# EAGLE board 13584_SparkFun_Photon_Weather_Shield_panel_V11 (EAGLE 7.5.0), part 1 of 2
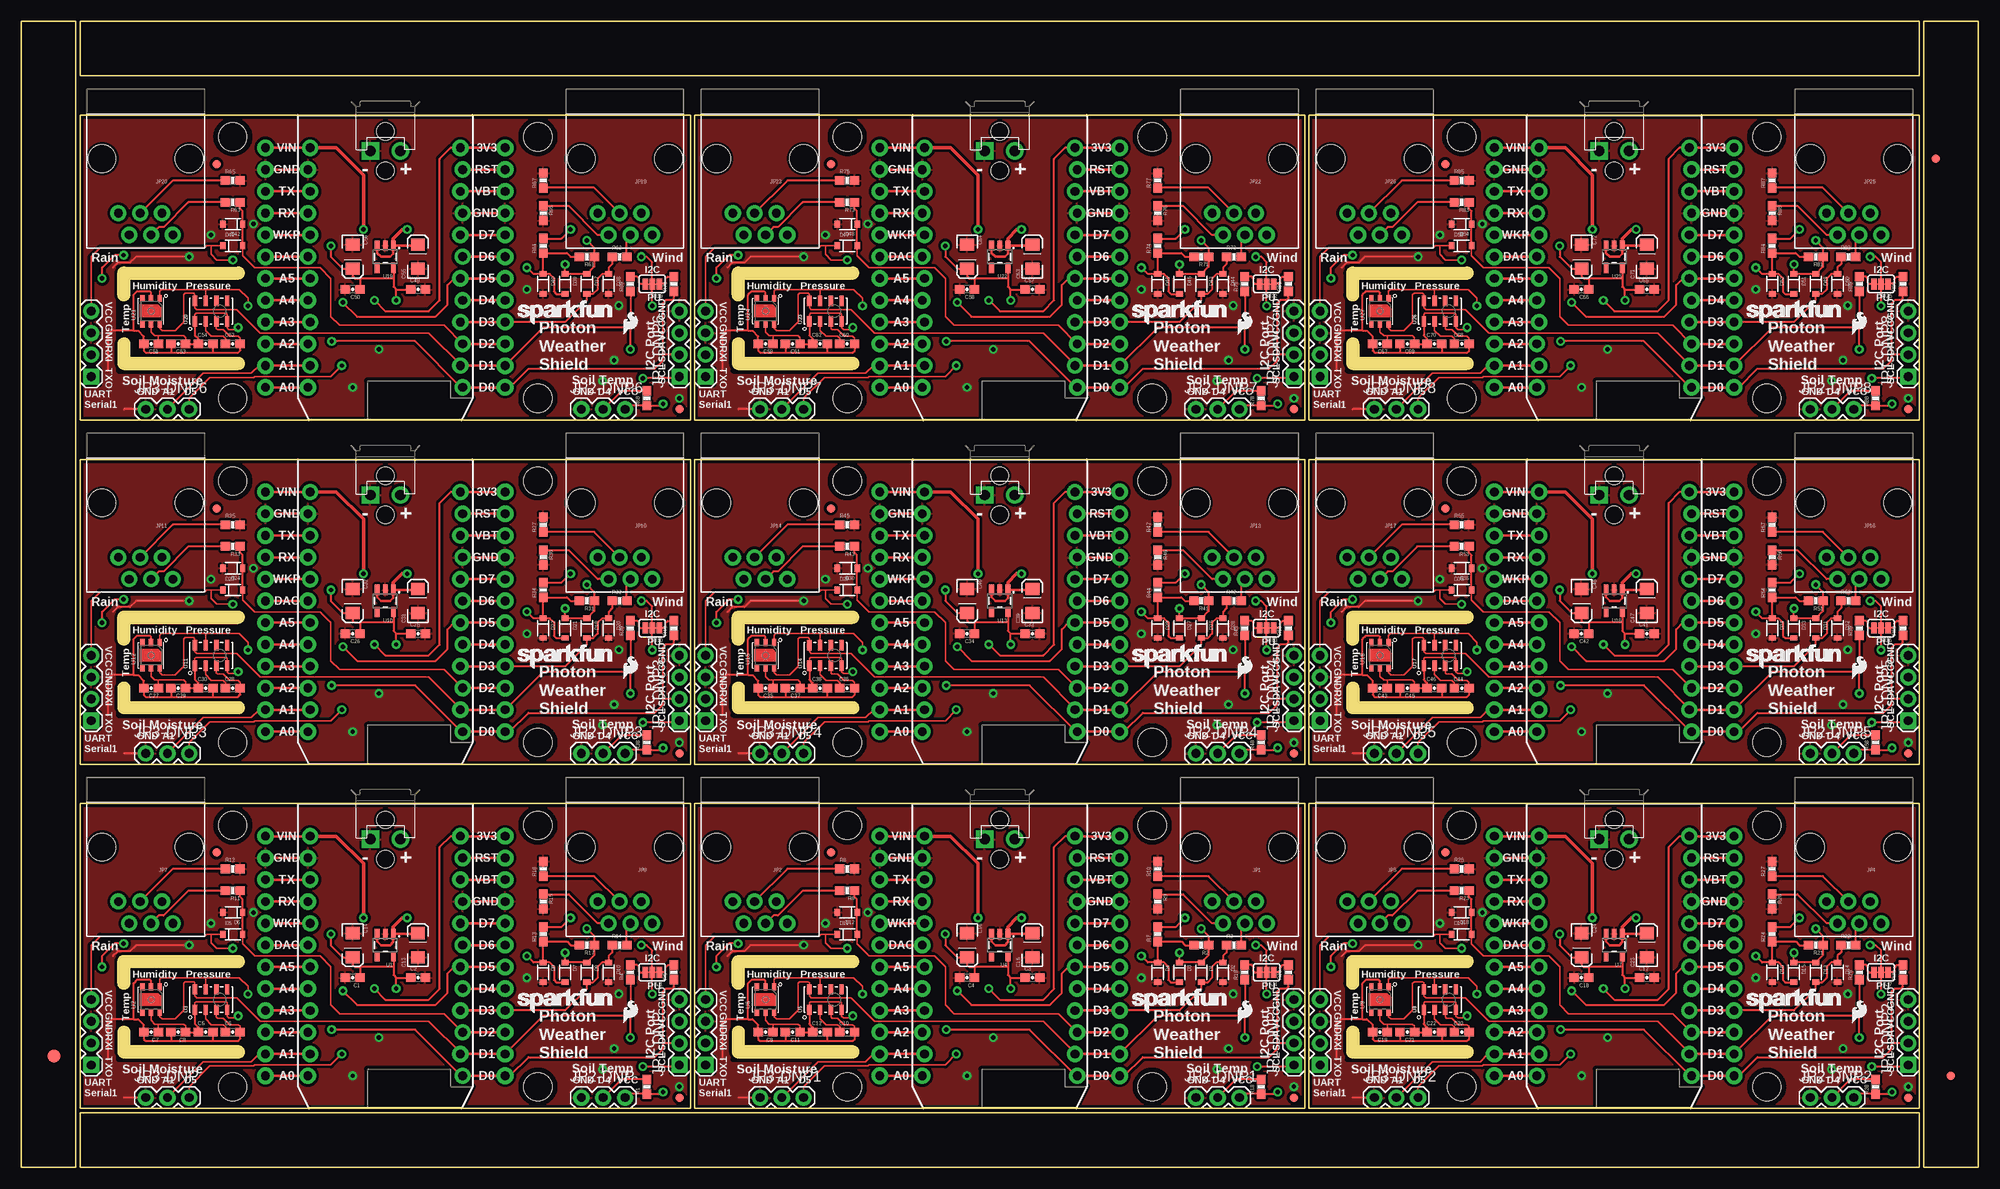
[diagram p0: board, top side]
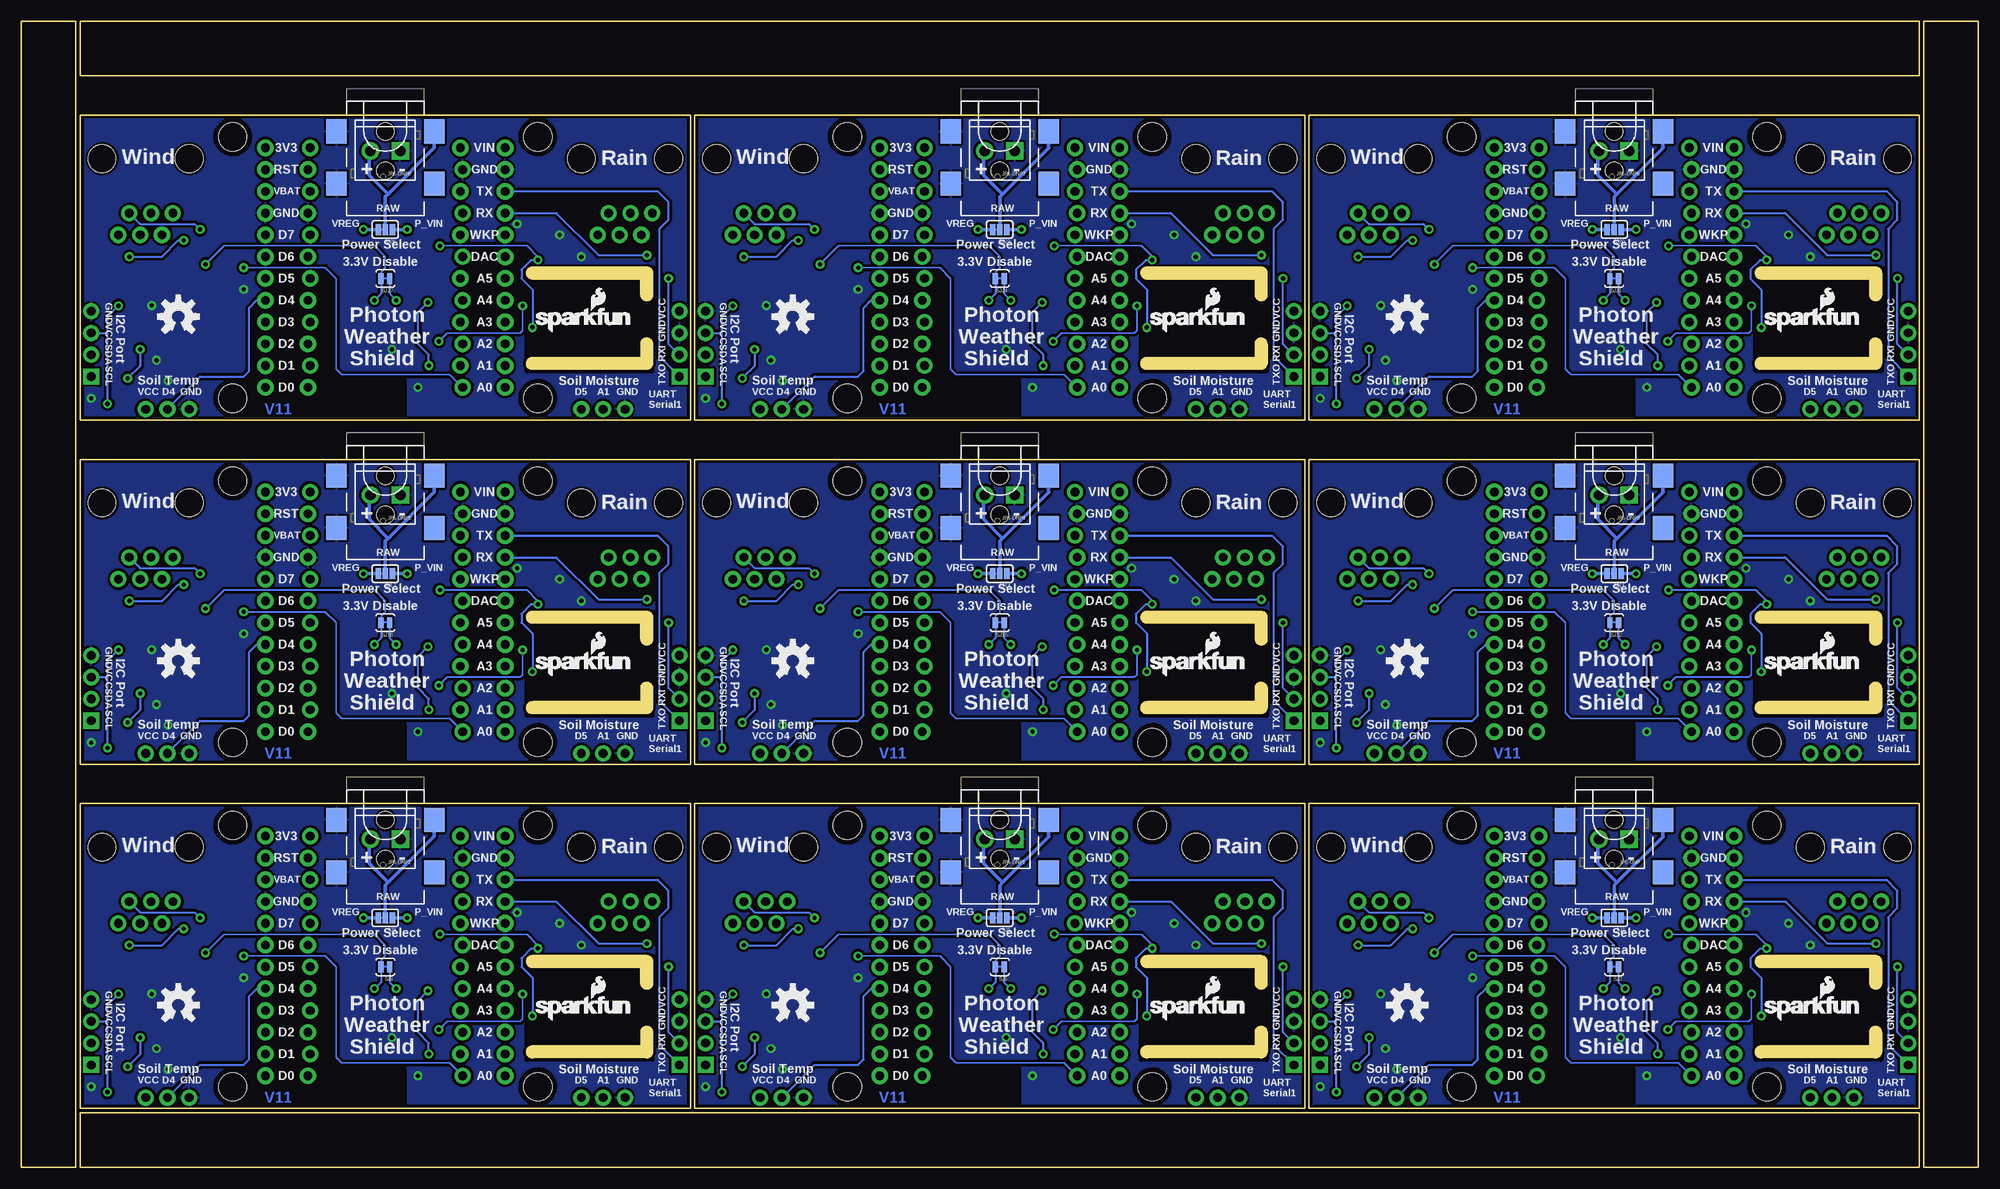
[diagram p1: board, bottom side, seen from below]

Size 228.09 x 133.6 mm. Coordinates in mm from the lower left corner, seen from the top.
Outline: 222 segments
Copper layers (1*16): Top 0.035mm / dielectric 1.5mm / Bottom 0.035mm
Design rules "SparkFun-2-layer-STANDARD": minimum track width 10mil, minimum drill 20mil, track to track 10mil, track to pad 8mil, pad to pad 8mil, via to via 10mil, smd to smd 8mil, copper to edge 8mil, drill to drill 8mil, minimum pad ring 10mil, minimum via ring 10mil, stop-mask expansion 4mil, vias tented up to drill 25mil, thermal gap 10mil
Net classes: 0 Default: width 0.203 mm; 1 vcc: width 0.203 mm
tRestrict: area 11.3,12.6 to 25.9,24.6; area 82.9,12.6 to 97.5,24.6; area 154.6,12.6 to 169.2,24.6; area 11.3,52.7 to 25.9,64.8; area 82.9,52.7 to 97.5,64.8; area 154.6,52.7 to 169.2,64.8; area 11.3,92.8 to 25.9,104.9; area 82.9,92.8 to 97.5,104.9; area 154.6,92.8 to 169.2,104.9
bRestrict: area 11.3,12.6 to 25.9,24.6; area 82.9,12.6 to 97.5,24.6; area 154.6,12.6 to 169.2,24.6; area 11.3,52.7 to 25.9,64.8; area 82.9,52.7 to 97.5,64.8; area 154.6,52.7 to 169.2,64.8; area 11.3,92.8 to 25.9,104.9; area 82.9,92.8 to 97.5,104.9; area 154.6,92.8 to 169.2,104.9
Milling: 36 lines

## Footprints (pad centres in the part's own frame; a part is rotated, then mirrored left to right if it is on the bottom)
0603-CAP = smd 1.1 x 1: 1 -0.85,0; 2 0.85,0
EIA3216 = smd 1.4 x 1.6: A 1.4,0; C -1.4,0
SOD-323 = smd 0.63 x 0.83: A 1.15,0; C -1.15,0
FIDUCIAL-1.5X3 = smd 1.5 x 1.5: 1 0,0
FIDUCIAL-1X2 = smd 1 x 1: 1 0,0
RJ11-6 = drill 1.016 pad 1.88: 1 -3.175,8.89; 2 -1.905,6.35; 3 -0.635,8.89; 4 0.635,6.35; 5 1.905,8.89; 6 3.175,6.35 | hole 3.251: -5.08,0; 5.08,0
1X04 = drill 1.016 pad 1.88 square: 1 0,0 | drill 1.016 pad 1.88: 2 2.54,0; 3 5.08,0; 4 7.62,0
1X03 = drill 1.016 pad 1.88: 1 0,0; 2 2.54,0; 3 5.08,0
SPARK_PHOTON_TEMPLATE_WIDE_LOCKING = drill 1.016 pad 1.905: 1 1.397,31.75; 2 1.143,29.21; 3 1.397,26.67; 4 1.143,24.13; 5 1.397,21.59; 6 1.143,19.05; 7 1.397,16.51; 8 1.143,13.97; 9 1.397,11.43; 10 1.143,8.89; 11 1.397,6.35; 12 1.143,3.81; 13 19.177,3.81; 14 18.923,6.35; 15 19.177,8.89; 16 18.923,11.43; 17 19.177,13.97; 18 18.923,16.51; 19 19.177,19.05; 20 18.923,21.59; 21 19.177,24.13; 22 18.923,26.67; 23 19.177,29.21; 24 18.923,31.75 | drill 1.016 pad 1.93: 3V3 24.13,31.75; A0 -3.81,3.81; A1 -3.81,6.35; A2 -3.81,8.89; A3 -3.81,11.43; A4 -3.81,13.97; A5 -3.81,16.51; D0 24.13,3.81; D1 24.13,6.35; D2 24.13,8.89; D3 24.13,11.43; D4 24.13,13.97; D5 24.13,16.51; D6 24.13,19.05; D7 24.13,21.59; DAC -3.81,19.05; GND@0 -3.81,29.21; GND@2 24.13,24.13; RST 24.13,29.21; RX -3.81,24.13; TX -3.81,26.67; VBAT 24.13,26.67; VIN -3.81,31.75; WKP -3.81,21.59 | hole 3.302: -7.62,33.02; 27.94,33.02; -7.62,2.54; 27.94,2.54
POWER_JACK_SMD = smd 2.8 x 2.4: GND 0,-5.7; P$4 6.1,-5.7; VIN0 0,5.7; VIN1 6.1,5.7 | hole 2.032: 0,0; 4.572,0
SCREWTERMINAL-3.5MM-2 = drill 1.2 pad 2.032 square: 1 0,0 | drill 1.2 pad 2.032: 2 3.5,0
0603-RES = smd 1.1 x 1: 1 -0.85,0; 2 0.85,0
PAD-JUMPER-3-3OF3_NC_BY_TRACE_YES_SILK_FULL_BOX = smd 0.635 x 1.27: 1 -0.813,0; 2 0,0; 3 0.813,0
PAD-JUMPER-3-2OF3_NC_BY_TRACE_YES_SILK_FULL_BOX = smd 0.635 x 1.27: 1 -0.813,0; 2 0,0; 3 0.813,0
PAD-JUMPER-2-NC_BY_TRACE_YES_SILK = smd 0.635 x 1.27: 1 -0.508,0; 2 0.508,0
SOT23-5 = smd 0.55 x 1.2: 1 -0.95,-1.3; 2 0,-1.3; 3 0.95,-1.3; 4 0.95,1.3; 5 -0.95,1.3
SI7021 = smd 0.8 x 0.5: DATA 1.5,-1; GND 1.5,0; NC@3 1.5,1; NC@4 -1.5,1; SCK -1.5,-1; VDD -1.5,0
LGA8 = smd 1.2 x 0.5: 1 -1.2,1.875; 2 -1.2,0.625; 3 -1.2,-0.625; 4 -1.2,-1.875; 5 1.2,-1.875; 6 1.2,-0.625; 7 1.2,0.625; 8 1.2,1.875

## Placement (x,y rotation side)
C1  1.0uF  [0603-CAP]  38.61,22.1 180 top
C2  0.1uF  [0603-CAP]  46.23,22.1 0 top
C3  0.1uF  [0603-CAP]  117.86,22.1 0 top
C4  1.0uF  [0603-CAP]  110.24,22.1 180 top
C5  0.1uF  [0603-CAP]  21.46,15.75 0 top
C6  0.1uF  [0603-CAP]  24.64,15.75 0 top
C7  0.1uF  [0603-CAP]  15.11,15.75 180 top
C8  1.0uF  [0603-CAP]  18.29,15.75 180 top
C9  0.1uF  [0603-CAP]  86.74,15.75 180 top
C10  0.1uF  [0603-CAP]  96.27,15.75 0 top
C11  1.0uF  [0603-CAP]  89.92,15.75 180 top
C12  0.1uF  [0603-CAP]  93.09,15.75 0 top
C13  10uF  [EIA3216]  46.23,25.91 90 top
C14  10uF  [EIA3216]  38.61,25.91 270 top
C15  10uF  [EIA3216]  117.86,25.91 90 top
C16  10uF  [EIA3216]  110.24,25.91 270 top
C17  0.1uF  [0603-CAP]  189.48,22.1 0 top
C18  1.0uF  [0603-CAP]  181.86,22.1 180 top
C19  0.1uF  [0603-CAP]  158.37,15.75 180 top
C20  0.1uF  [0603-CAP]  167.89,15.75 0 top
C21  1.0uF  [0603-CAP]  161.54,15.75 180 top
C22  0.1uF  [0603-CAP]  164.72,15.75 0 top
C23  10uF  [EIA3216]  189.48,25.91 90 top
C24  10uF  [EIA3216]  181.86,25.91 270 top
C25  0.1uF  [0603-CAP]  46.23,62.23 0 top
C26  1.0uF  [0603-CAP]  38.61,62.23 180 top
C27  0.1uF  [0603-CAP]  15.11,55.88 180 top
C28  0.1uF  [0603-CAP]  24.64,55.88 0 top
C29  1.0uF  [0603-CAP]  18.29,55.88 180 top
C30  0.1uF  [0603-CAP]  21.46,55.88 0 top
C31  10uF  [EIA3216]  46.23,66.04 90 top
C32  10uF  [EIA3216]  38.61,66.04 270 top
C33  0.1uF  [0603-CAP]  117.86,62.23 0 top
C34  1.0uF  [0603-CAP]  110.24,62.23 180 top
C35  0.1uF  [0603-CAP]  86.74,55.88 180 top
C36  0.1uF  [0603-CAP]  96.27,55.88 0 top
C37  1.0uF  [0603-CAP]  89.92,55.88 180 top
C38  0.1uF  [0603-CAP]  93.09,55.88 0 top
C39  10uF  [EIA3216]  117.86,66.04 90 top
C40  10uF  [EIA3216]  110.24,66.04 270 top
C41  0.1uF  [0603-CAP]  189.48,62.23 0 top
C42  1.0uF  [0603-CAP]  181.86,62.23 180 top
C43  0.1uF  [0603-CAP]  158.37,55.88 180 top
C44  0.1uF  [0603-CAP]  167.89,55.88 0 top
C45  1.0uF  [0603-CAP]  161.54,55.88 180 top
C46  0.1uF  [0603-CAP]  164.72,55.88 0 top
C47  10uF  [EIA3216]  189.48,66.04 90 top
C48  10uF  [EIA3216]  181.86,66.04 270 top
C49  0.1uF  [0603-CAP]  46.23,102.36 0 top
C50  1.0uF  [0603-CAP]  38.61,102.36 180 top
C51  0.1uF  [0603-CAP]  15.11,96.01 180 top
C52  0.1uF  [0603-CAP]  24.64,96.01 0 top
C53  1.0uF  [0603-CAP]  18.29,96.01 180 top
C54  0.1uF  [0603-CAP]  21.46,96.01 0 top
C55  10uF  [EIA3216]  46.23,106.17 90 top
C56  10uF  [EIA3216]  38.61,106.17 270 top
C57  0.1uF  [0603-CAP]  117.86,102.36 0 top
C58  1.0uF  [0603-CAP]  110.24,102.36 180 top
C59  0.1uF  [0603-CAP]  86.74,96.01 180 top
C60  0.1uF  [0603-CAP]  96.27,96.01 0 top
C61  1.0uF  [0603-CAP]  89.92,96.01 180 top
C62  0.1uF  [0603-CAP]  93.09,96.01 0 top
C63  10uF  [EIA3216]  117.86,106.17 90 top
C64  10uF  [EIA3216]  110.24,106.17 270 top
C65  0.1uF  [0603-CAP]  189.48,102.36 0 top
C66  1.0uF  [0603-CAP]  181.86,102.36 180 top
C67  0.1uF  [0603-CAP]  158.37,96.01 180 top
C68  0.1uF  [0603-CAP]  167.89,96.01 0 top
C69  1.0uF  [0603-CAP]  161.54,96.01 180 top
C70  0.1uF  [0603-CAP]  164.72,96.01 0 top
C71  10uF  [EIA3216]  189.48,106.17 90 top
C72  10uF  [EIA3216]  181.86,106.17 270 top
D1  250mA/100V  [SOD-323]  137.54,22.73 270 top
D2  250mA/100V  [SOD-323]  140.08,22.73 270 top
D3  250mA/100V  [SOD-323]  135,22.73 270 top
D4  250mA/100V  [SOD-323]  132.46,22.73 270 top
D5  250mA/100V  [SOD-323]  24.64,27.18 0 top
D6  250mA/100V  [SOD-323]  24.64,29.72 180 top
D7  250mA/100V  [SOD-323]  63.37,22.73 270 top
D8  250mA/100V  [SOD-323]  60.83,22.73 270 top
D9  250mA/100V  [SOD-323]  65.91,22.73 270 top
D10  250mA/100V  [SOD-323]  68.45,22.73 270 top
D11  250mA/100V  [SOD-323]  96.27,27.18 0 top
D12  250mA/100V  [SOD-323]  96.27,29.72 180 top
D13  250mA/100V  [SOD-323]  209.17,22.73 270 top
D14  250mA/100V  [SOD-323]  211.71,22.73 270 top
D15  250mA/100V  [SOD-323]  206.63,22.73 270 top
D16  250mA/100V  [SOD-323]  204.09,22.73 270 top
D17  250mA/100V  [SOD-323]  167.89,27.18 0 top
D18  250mA/100V  [SOD-323]  167.89,29.72 180 top
D19  250mA/100V  [SOD-323]  65.91,62.87 270 top
D20  250mA/100V  [SOD-323]  68.45,62.87 270 top
D21  250mA/100V  [SOD-323]  63.37,62.87 270 top
D22  250mA/100V  [SOD-323]  60.83,62.87 270 top
D23  250mA/100V  [SOD-323]  24.64,67.31 0 top
D24  250mA/100V  [SOD-323]  24.64,69.85 180 top
D25  250mA/100V  [SOD-323]  137.54,62.87 270 top
D26  250mA/100V  [SOD-323]  140.08,62.87 270 top
D27  250mA/100V  [SOD-323]  135,62.87 270 top
D28  250mA/100V  [SOD-323]  132.46,62.87 270 top
D29  250mA/100V  [SOD-323]  96.27,67.31 0 top
D30  250mA/100V  [SOD-323]  96.27,69.85 180 top
D31  250mA/100V  [SOD-323]  209.17,62.87 270 top
D32  250mA/100V  [SOD-323]  211.71,62.87 270 top
D33  250mA/100V  [SOD-323]  206.63,62.87 270 top
D34  250mA/100V  [SOD-323]  204.09,62.87 270 top
D35  250mA/100V  [SOD-323]  167.89,67.31 0 top
D36  250mA/100V  [SOD-323]  167.89,69.85 180 top
D37  250mA/100V  [SOD-323]  65.91,103 270 top
D38  250mA/100V  [SOD-323]  68.45,103 270 top
D39  250mA/100V  [SOD-323]  63.37,103 270 top
D40  250mA/100V  [SOD-323]  60.83,103 270 top
D41  250mA/100V  [SOD-323]  24.64,107.44 0 top
D42  250mA/100V  [SOD-323]  24.64,109.98 180 top
D43  250mA/100V  [SOD-323]  137.54,103 270 top
D44  250mA/100V  [SOD-323]  140.08,103 270 top
D45  250mA/100V  [SOD-323]  135,103 270 top
D46  250mA/100V  [SOD-323]  132.46,103 270 top
D47  250mA/100V  [SOD-323]  96.27,107.44 0 top
D48  250mA/100V  [SOD-323]  96.27,109.98 180 top
D49  250mA/100V  [SOD-323]  209.17,103 270 top
D50  250mA/100V  [SOD-323]  211.71,103 270 top
D51  250mA/100V  [SOD-323]  206.63,103 270 top
D52  250mA/100V  [SOD-323]  204.09,103 270 top
D53  250mA/100V  [SOD-323]  167.89,107.44 0 top
D54  250mA/100V  [SOD-323]  167.89,109.98 180 top
E$1  [FIDUCIAL-1.5X3]  3.81,12.95 0 top
E$7  [FIDUCIAL-1X2]  224.92,10.67 0 top
E$8  [FIDUCIAL-1X2]  223.14,117.6 180 top
FID1  FIDUCIAL1X2  [FIDUCIAL-1X2]  76.71,8.13 0 top
FID2  FIDUCIAL1X2  [FIDUCIAL-1X2]  22.73,36.7 0 top
FID3  FIDUCIAL1X2  [FIDUCIAL-1X2]  148.34,8.13 0 top
FID4  FIDUCIAL1X2  [FIDUCIAL-1X2]  94.36,36.7 0 top
FID5  FIDUCIAL1X2  [FIDUCIAL-1X2]  219.96,8.13 0 top
FID6  FIDUCIAL1X2  [FIDUCIAL-1X2]  165.99,36.7 0 top
FID7  FIDUCIAL1X2  [FIDUCIAL-1X2]  76.71,48.26 0 top
FID8  FIDUCIAL1X2  [FIDUCIAL-1X2]  22.73,76.83 0 top
FID9  FIDUCIAL1X2  [FIDUCIAL-1X2]  148.34,48.26 0 top
FID10  FIDUCIAL1X2  [FIDUCIAL-1X2]  94.36,76.83 0 top
FID11  FIDUCIAL1X2  [FIDUCIAL-1X2]  219.96,48.26 0 top
FID12  FIDUCIAL1X2  [FIDUCIAL-1X2]  165.99,76.83 0 top
FID13  FIDUCIAL1X2  [FIDUCIAL-1X2]  76.71,88.39 0 top
FID14  FIDUCIAL1X2  [FIDUCIAL-1X2]  22.73,116.97 0 top
FID15  FIDUCIAL1X2  [FIDUCIAL-1X2]  148.34,88.39 0 top
FID16  FIDUCIAL1X2  [FIDUCIAL-1X2]  94.36,116.97 0 top
FID17  FIDUCIAL1X2  [FIDUCIAL-1X2]  219.96,88.39 0 top
FID18  FIDUCIAL1X2  [FIDUCIAL-1X2]  165.99,116.97 0 top
JP1  RJ11  [RJ11-6]  141.99,37.34 180 top
JP1-DNP  I2C Port  [1X04]  76.71,11.94 90 top
JP1-DNP1  I2C Port  [1X04]  148.34,11.94 90 top
JP1-DNP2  I2C Port  [1X04]  219.96,11.94 90 top
JP1-DNP3  I2C Port  [1X04]  76.71,52.07 90 top
JP1-DNP4  I2C Port  [1X04]  148.34,52.07 90 top
JP1-DNP5  I2C Port  [1X04]  219.96,52.07 90 top
JP1-DNP6  I2C Port  [1X04]  76.71,92.2 90 top
JP1-DNP7  I2C Port  [1X04]  148.34,92.2 90 top
JP1-DNP8  I2C Port  [1X04]  219.96,92.2 90 top
JP2  RJ11  [RJ11-6]  86.11,37.34 180 top
JP2-DNP  Soil/Water Temp  [1X03]  65.28,8.13 0 top
JP2-DNP1  Soil/Water Temp  [1X03]  136.91,8.13 0 top
JP2-DNP2  Soil/Water Temp  [1X03]  208.53,8.13 0 top
JP2-DNP3  Soil/Water Temp  [1X03]  65.28,48.26 0 top
JP2-DNP4  Soil/Water Temp  [1X03]  136.91,48.26 0 top
JP2-DNP5  Soil/Water Temp  [1X03]  208.53,48.26 0 top
JP2-DNP6  Soil/Water Temp  [1X03]  65.28,88.39 0 top
JP2-DNP7  Soil/Water Temp  [1X03]  136.91,88.39 0 top
JP2-DNP8  Soil/Water Temp  [1X03]  208.53,88.39 0 top
JP3  PHOTON_TEMPLATE_WIDE_LOCKING  [SPARK_PHOTON_TEMPLATE_WIDE_LOCKING]  103.89,6.86 0 top
JP3-DNP  Soil Moisture  [1X03]  14.48,8.13 0 top
JP3-DNP1  Soil Moisture  [1X03]  86.11,8.13 0 top
JP3-DNP2  Soil Moisture  [1X03]  157.73,8.13 0 top
JP3-DNP3  Soil Moisture  [1X03]  14.48,48.26 0 top
JP3-DNP4  Soil Moisture  [1X03]  86.11,48.26 0 top
JP3-DNP5  Soil Moisture  [1X03]  157.73,48.26 0 top
JP3-DNP6  Soil Moisture  [1X03]  14.48,88.39 0 top
JP3-DNP7  Soil Moisture  [1X03]  86.11,88.39 0 top
JP3-DNP8  Soil Moisture  [1X03]  157.73,88.39 0 top
JP4  RJ11  [RJ11-6]  213.61,37.34 180 top
JP4-DNP  Serial1 Port  [1X04]  8.13,11.94 90 top
JP4-DNP1  Serial1 Port  [1X04]  79.76,11.94 90 top
JP4-DNP2  Serial1 Port  [1X04]  151.38,11.94 90 top
JP4-DNP3  Serial1 Port  [1X04]  8.13,52.07 90 top
JP4-DNP4  Serial1 Port  [1X04]  79.76,52.07 90 top
JP4-DNP5  Serial1 Port  [1X04]  151.38,52.07 90 top
JP4-DNP6  Serial1 Port  [1X04]  8.13,92.2 90 top
JP4-DNP7  Serial1 Port  [1X04]  79.76,92.2 90 top
JP4-DNP8  Serial1 Port  [1X04]  151.38,92.2 90 top
JP5  RJ11  [RJ11-6]  157.73,37.34 180 top
JP5-DNP  5.5x2.1mm Barrel  [POWER_JACK_SMD]  42.42,40.51 270 bottom
JP5-DNP1  5.5x2.1mm Barrel  [POWER_JACK_SMD]  114.05,40.51 270 bottom
JP5-DNP2  5.5x2.1mm Barrel  [POWER_JACK_SMD]  185.67,40.51 270 bottom
JP5-DNP3  5.5x2.1mm Barrel  [POWER_JACK_SMD]  42.42,80.64 270 bottom
JP5-DNP4  5.5x2.1mm Barrel  [POWER_JACK_SMD]  114.05,80.64 270 bottom
JP5-DNP5  5.5x2.1mm Barrel  [POWER_JACK_SMD]  185.67,80.64 270 bottom
JP5-DNP6  5.5x2.1mm Barrel  [POWER_JACK_SMD]  42.42,120.78 270 bottom
JP5-DNP7  5.5x2.1mm Barrel  [POWER_JACK_SMD]  114.05,120.78 270 bottom
JP5-DNP8  5.5x2.1mm Barrel  [POWER_JACK_SMD]  185.67,120.78 270 bottom
JP6  PHOTON_TEMPLATE_WIDE_LOCKING  [SPARK_PHOTON_TEMPLATE_WIDE_LOCKING]  175.51,6.86 0 top
JP6-DNP  [SCREWTERMINAL-3.5MM-2]  40.67,38.25 180 bottom
JP6-DNP1  [SCREWTERMINAL-3.5MM-2]  112.29,38.25 180 bottom
JP6-DNP2  [SCREWTERMINAL-3.5MM-2]  183.92,38.25 180 bottom
JP6-DNP3  [SCREWTERMINAL-3.5MM-2]  40.67,78.38 180 bottom
JP6-DNP4  [SCREWTERMINAL-3.5MM-2]  112.29,78.38 180 bottom
JP6-DNP5  [SCREWTERMINAL-3.5MM-2]  183.92,78.38 180 bottom
JP6-DNP6  [SCREWTERMINAL-3.5MM-2]  40.67,118.52 180 bottom
JP6-DNP7  [SCREWTERMINAL-3.5MM-2]  112.29,118.52 180 bottom
JP6-DNP8  [SCREWTERMINAL-3.5MM-2]  183.92,118.52 180 bottom
JP7  RJ11  [RJ11-6]  14.48,37.34 180 top
JP8  RJ11  [RJ11-6]  70.36,37.34 180 top
JP9  PHOTON_TEMPLATE_WIDE_LOCKING  [SPARK_PHOTON_TEMPLATE_WIDE_LOCKING]  32.26,6.86 0 top
JP10  RJ11  [RJ11-6]  70.36,77.47 180 top
JP11  RJ11  [RJ11-6]  14.48,77.47 180 top
JP12  PHOTON_TEMPLATE_WIDE_LOCKING  [SPARK_PHOTON_TEMPLATE_WIDE_LOCKING]  32.26,46.99 0 top
JP13  RJ11  [RJ11-6]  141.99,77.47 180 top
JP14  RJ11  [RJ11-6]  86.11,77.47 180 top
JP15  PHOTON_TEMPLATE_WIDE_LOCKING  [SPARK_PHOTON_TEMPLATE_WIDE_LOCKING]  103.89,46.99 0 top
JP16  RJ11  [RJ11-6]  213.61,77.47 180 top
JP17  RJ11  [RJ11-6]  157.73,77.47 180 top
JP18  PHOTON_TEMPLATE_WIDE_LOCKING  [SPARK_PHOTON_TEMPLATE_WIDE_LOCKING]  175.51,46.99 0 top
JP19  RJ11  [RJ11-6]  70.36,117.6 180 top
JP20  RJ11  [RJ11-6]  14.48,117.6 180 top
JP21  PHOTON_TEMPLATE_WIDE_LOCKING  [SPARK_PHOTON_TEMPLATE_WIDE_LOCKING]  32.26,87.12 0 top
JP22  RJ11  [RJ11-6]  141.99,117.6 180 top
JP23  RJ11  [RJ11-6]  86.11,117.6 180 top
JP24  PHOTON_TEMPLATE_WIDE_LOCKING  [SPARK_PHOTON_TEMPLATE_WIDE_LOCKING]  103.89,87.12 0 top
JP25  RJ11  [RJ11-6]  213.61,117.6 180 top
JP26  RJ11  [RJ11-6]  157.73,117.6 180 top
JP27  PHOTON_TEMPLATE_WIDE_LOCKING  [SPARK_PHOTON_TEMPLATE_WIDE_LOCKING]  175.51,87.12 0 top
LOGO1  OSHW-LOGOM  [OSHW-LOGO-M]  66.55,18.92 0 bottom
LOGO2  SFE_LOGO_NAME.1_INCH  [SFE_LOGO_NAME_.1]  57.4,17.53 0 top
LOGO3  OSHW-LOGOM  [OSHW-LOGO-M]  138.18,18.92 0 bottom
LOGO4  SFE_LOGO_NAME.1_INCH  [SFE_LOGO_NAME_.1]  129.03,17.53 0 top
LOGO5  OSHW-LOGOM  [OSHW-LOGO-M]  209.8,18.92 0 bottom
LOGO6  SFE_LOGO_NAME.1_INCH  [SFE_LOGO_NAME_.1]  200.66,17.53 0 top
LOGO7  OSHW-LOGOM  [OSHW-LOGO-M]  66.55,59.05 0 bottom
LOGO8  SFE_LOGO_NAME.1_INCH  [SFE_LOGO_NAME_.1]  57.4,57.66 0 top
LOGO9  OSHW-LOGOM  [OSHW-LOGO-M]  138.18,59.05 0 bottom
LOGO10  SFE_LOGO_NAME.1_INCH  [SFE_LOGO_NAME_.1]  129.03,57.66 0 top
LOGO11  OSHW-LOGOM  [OSHW-LOGO-M]  209.8,59.05 0 bottom
LOGO12  SFE_LOGO_NAME.1_INCH  [SFE_LOGO_NAME_.1]  200.66,57.66 0 top
LOGO13  OSHW-LOGOM  [OSHW-LOGO-M]  66.55,99.19 0 bottom
LOGO14  SFE_LOGO_NAME.1_INCH  [SFE_LOGO_NAME_.1]  57.4,97.79 0 top
LOGO15  OSHW-LOGOM  [OSHW-LOGO-M]  138.18,99.19 0 bottom
LOGO16  SFE_LOGO_NAME.1_INCH  [SFE_LOGO_NAME_.1]  129.03,97.79 0 top
LOGO17  OSHW-LOGOM  [OSHW-LOGO-M]  209.8,99.19 0 bottom
LOGO18  SFE_LOGO_NAME.1_INCH  [SFE_LOGO_NAME_.1]  200.66,97.79 0 top
R1  4.7K  [0603-RES]  72.9,9.4 90 top
R2  4.7K  [0603-RES]  137.54,25.91 180 top
R3  1K  [0603-RES]  141.35,25.91 0 top
R4  4.7K  [0603-RES]  70.99,22.73 90 top
R5  4.7K  [0603-RES]  76.07,22.73 90 top
R6  1K  [0603-RES]  96.27,32.26 180 top
R7  1K  [0603-RES]  132.46,27.18 90 top
R8  1K  [0603-RES]  96.27,34.8 0 top
R9  1K  [0603-RES]  132.46,30.99 270 top
R10  1K  [0603-RES]  132.46,34.8 90 top
R11  1K  [0603-RES]  24.64,32.26 180 top
R12  1K  [0603-RES]  24.64,34.8 0 top
R13  1K  [0603-RES]  60.83,27.18 90 top
R14  1K  [0603-RES]  69.72,25.91 0 top
R15  1K  [0603-RES]  60.83,30.99 270 top
R16  1K  [0603-RES]  60.83,34.8 90 top
R17  4.7K  [0603-RES]  65.91,25.91 180 top
R18  4.7K  [0603-RES]  144.53,9.4 90 top
R19  4.7K  [0603-RES]  142.62,22.73 90 top
R20  4.7K  [0603-RES]  147.7,22.73 90 top
R21  4.7K  [0603-RES]  209.17,25.91 180 top
R22  1K  [0603-RES]  212.98,25.91 0 top
R23  1K  [0603-RES]  167.89,32.26 180 top
R24  1K  [0603-RES]  204.09,27.18 90 top
R25  1K  [0603-RES]  167.89,34.8 0 top
R26  1K  [0603-RES]  204.09,30.99 270 top
R27  1K  [0603-RES]  204.09,34.8 90 top
R28  4.7K  [0603-RES]  216.15,9.4 90 top
R29  4.7K  [0603-RES]  214.25,22.73 90 top
R30  4.7K  [0603-RES]  219.33,22.73 90 top
R31  4.7K  [0603-RES]  65.91,66.04 180 top
R32  1K  [0603-RES]  69.72,66.04 0 top
R33  1K  [0603-RES]  24.64,72.39 180 top
R34  1K  [0603-RES]  60.83,67.31 90 top
R35  1K  [0603-RES]  24.64,74.93 0 top
R36  1K  [0603-RES]  60.83,71.12 270 top
R37  1K  [0603-RES]  60.83,74.93 90 top
R38  4.7K  [0603-RES]  72.9,49.53 90 top
R39  4.7K  [0603-RES]  70.99,62.87 90 top
R40  4.7K  [0603-RES]  76.07,62.87 90 top
R41  4.7K  [0603-RES]  137.54,66.04 180 top
R42  1K  [0603-RES]  141.35,66.04 0 top
R43  1K  [0603-RES]  96.27,72.39 180 top
R44  1K  [0603-RES]  132.46,67.31 90 top
R45  1K  [0603-RES]  96.27,74.93 0 top
R46  1K  [0603-RES]  132.46,71.12 270 top
R47  1K  [0603-RES]  132.46,74.93 90 top
R48  4.7K  [0603-RES]  144.53,49.53 90 top
R49  4.7K  [0603-RES]  142.62,62.87 90 top
R50  4.7K  [0603-RES]  147.7,62.87 90 top
R51  4.7K  [0603-RES]  209.17,66.04 180 top
R52  1K  [0603-RES]  212.98,66.04 0 top
R53  1K  [0603-RES]  167.89,72.39 180 top
R54  1K  [0603-RES]  204.09,67.31 90 top
R55  1K  [0603-RES]  167.89,74.93 0 top
R56  1K  [0603-RES]  204.09,71.12 270 top
R57  1K  [0603-RES]  204.09,74.93 90 top
R58  4.7K  [0603-RES]  216.15,49.53 90 top
R59  4.7K  [0603-RES]  214.25,62.87 90 top
R60  4.7K  [0603-RES]  219.33,62.87 90 top
R61  4.7K  [0603-RES]  65.91,106.17 180 top
R62  1K  [0603-RES]  69.72,106.17 0 top
R63  1K  [0603-RES]  24.64,112.52 180 top
R64  1K  [0603-RES]  60.83,107.44 90 top
R65  1K  [0603-RES]  24.64,115.06 0 top
R66  1K  [0603-RES]  60.83,111.25 270 top
R67  1K  [0603-RES]  60.83,115.06 90 top
R68  4.7K  [0603-RES]  72.9,89.66 90 top
R69  4.7K  [0603-RES]  70.99,103 90 top
R70  4.7K  [0603-RES]  76.07,103 90 top
R71  4.7K  [0603-RES]  137.54,106.17 180 top
R72  1K  [0603-RES]  141.35,106.17 0 top
R73  1K  [0603-RES]  96.27,112.52 180 top
R74  1K  [0603-RES]  132.46,107.44 90 top
R75  1K  [0603-RES]  96.27,115.06 0 top
R76  1K  [0603-RES]  132.46,111.25 270 top
R77  1K  [0603-RES]  132.46,115.06 90 top
R78  4.7K  [0603-RES]  144.53,89.66 90 top
R79  4.7K  [0603-RES]  142.62,103 90 top
R80  4.7K  [0603-RES]  147.7,103 90 top
R81  4.7K  [0603-RES]  209.17,106.17 180 top
R82  1K  [0603-RES]  212.98,106.17 0 top
R83  1K  [0603-RES]  167.89,112.52 180 top
R84  1K  [0603-RES]  204.09,107.44 90 top
R85  1K  [0603-RES]  167.89,115.06 0 top
R86  1K  [0603-RES]  204.09,111.25 270 top
R87  1K  [0603-RES]  204.09,115.06 90 top
R88  4.7K  [0603-RES]  216.15,89.66 90 top
R89  4.7K  [0603-RES]  214.25,103 90 top
R90  4.7K  [0603-RES]  219.33,103 90 top
SJ1  [PAD-JUMPER-3-3OF3_NC_BY_TRACE_YES_SILK_FULL_BOX]  73.53,22.73 180 top
SJ2  [PAD-JUMPER-3-2OF3_NC_BY_TRACE_YES_SILK_FULL_BOX]  42.42,29.08 180 bottom
SJ3  [PAD-JUMPER-2-NC_BY_TRACE_YES_SILK]  42.42,23.37 180 bottom
SJ4  [PAD-JUMPER-3-3OF3_NC_BY_TRACE_YES_SILK_FULL_BOX]  145.16,22.73 180 top
SJ5  [PAD-JUMPER-3-2OF3_NC_BY_TRACE_YES_SILK_FULL_BOX]  114.05,29.08 180 bottom
SJ6  [PAD-JUMPER-2-NC_BY_TRACE_YES_SILK]  114.05,23.37 180 bottom
SJ7  [PAD-JUMPER-3-3OF3_NC_BY_TRACE_YES_SILK_FULL_BOX]  216.79,22.73 180 top
SJ8  [PAD-JUMPER-3-2OF3_NC_BY_TRACE_YES_SILK_FULL_BOX]  185.67,29.08 180 bottom
SJ9  [PAD-JUMPER-2-NC_BY_TRACE_YES_SILK]  185.67,23.37 180 bottom
SJ10  [PAD-JUMPER-3-3OF3_NC_BY_TRACE_YES_SILK_FULL_BOX]  73.53,62.87 180 top
SJ11  [PAD-JUMPER-3-2OF3_NC_BY_TRACE_YES_SILK_FULL_BOX]  42.42,69.22 180 bottom
SJ12  [PAD-JUMPER-2-NC_BY_TRACE_YES_SILK]  42.42,63.5 180 bottom
SJ13  [PAD-JUMPER-3-3OF3_NC_BY_TRACE_YES_SILK_FULL_BOX]  145.16,62.87 180 top
SJ14  [PAD-JUMPER-3-2OF3_NC_BY_TRACE_YES_SILK_FULL_BOX]  114.05,69.22 180 bottom
SJ15  [PAD-JUMPER-2-NC_BY_TRACE_YES_SILK]  114.05,63.5 180 bottom
SJ16  [PAD-JUMPER-3-3OF3_NC_BY_TRACE_YES_SILK_FULL_BOX]  216.79,62.87 180 top
SJ17  [PAD-JUMPER-3-2OF3_NC_BY_TRACE_YES_SILK_FULL_BOX]  185.67,69.22 180 bottom
SJ18  [PAD-JUMPER-2-NC_BY_TRACE_YES_SILK]  185.67,63.5 180 bottom
SJ19  [PAD-JUMPER-3-3OF3_NC_BY_TRACE_YES_SILK_FULL_BOX]  73.53,103 180 top
SJ20  [PAD-JUMPER-3-2OF3_NC_BY_TRACE_YES_SILK_FULL_BOX]  42.42,109.35 180 bottom
SJ21  [PAD-JUMPER-2-NC_BY_TRACE_YES_SILK]  42.42,103.63 180 bottom
SJ22  [PAD-JUMPER-3-3OF3_NC_BY_TRACE_YES_SILK_FULL_BOX]  145.16,103 180 top
SJ23  [PAD-JUMPER-3-2OF3_NC_BY_TRACE_YES_SILK_FULL_BOX]  114.05,109.35 180 bottom
SJ24  [PAD-JUMPER-2-NC_BY_TRACE_YES_SILK]  114.05,103.63 180 bottom
SJ25  [PAD-JUMPER-3-3OF3_NC_BY_TRACE_YES_SILK_FULL_BOX]  216.79,103 180 top
SJ26  [PAD-JUMPER-3-2OF3_NC_BY_TRACE_YES_SILK_FULL_BOX]  185.67,109.35 180 bottom
SJ27  [PAD-JUMPER-2-NC_BY_TRACE_YES_SILK]  185.67,103.63 180 bottom
U1  3.3V MIC5219  [SOT23-5]  42.42,25.91 180 top
U2  SI7021  [SI7021]  15.11,19.56 90 top
U3  MPL3115A2LGA8  [LGA8]  22.1,19.56 90 top
U4  3.3V MIC5219  [SOT23-5]  114.05,25.91 180 top
U5  MPL3115A2LGA8  [LGA8]  93.73,19.56 90 top
U6  SI7021  [SI7021]  86.74,19.56 90 top
U7  3.3V MIC5219  [SOT23-5]  185.67,25.91 180 top
U8  MPL3115A2LGA8  [LGA8]  165.35,19.56 90 top
U9  SI7021  [SI7021]  158.37,19.56 90 top
U10  3.3V MIC5219  [SOT23-5]  42.42,66.04 180 top
U11  MPL3115A2LGA8  [LGA8]  22.1,59.69 90 top
U12  SI7021  [SI7021]  15.11,59.69 90 top
U13  3.3V MIC5219  [SOT23-5]  114.05,66.04 180 top
U14  MPL3115A2LGA8  [LGA8]  93.73,59.69 90 top
U15  SI7021  [SI7021]  86.74,59.69 90 top
U16  3.3V MIC5219  [SOT23-5]  185.67,66.04 180 top
U17  MPL3115A2LGA8  [LGA8]  165.35,59.69 90 top
U18  SI7021  [SI7021]  158.37,59.69 90 top
U19  3.3V MIC5219  [SOT23-5]  42.42,106.17 180 top
U20  MPL3115A2LGA8  [LGA8]  22.1,99.82 90 top
U21  SI7021  [SI7021]  15.11,99.82 90 top
U22  3.3V MIC5219  [SOT23-5]  114.05,106.17 180 top
U23  MPL3115A2LGA8  [LGA8]  93.73,99.82 90 top
U24  SI7021  [SI7021]  86.74,99.82 90 top
U25  3.3V MIC5219  [SOT23-5]  185.67,106.17 180 top
U26  MPL3115A2LGA8  [LGA8]  165.35,99.82 90 top
U27  SI7021  [SI7021]  158.37,99.82 90 top
U$1  [SFE_LOGO_NAME_FLAME_.1]  25.27,17.04 0 bottom
U$2  [SFE_LOGO_NAME_FLAME_.1]  96.9,17.04 0 bottom
U$3  [SFE_LOGO_FLAME_.1]  69.85,16.51 0 top
U$4  [SFE_LOGO_FLAME_.1]  141.48,16.51 0 top
U$5  [SFE_LOGO_NAME_FLAME_.1]  168.53,17.04 0 bottom
U$6  [SFE_LOGO_FLAME_.1]  213.11,16.51 0 top
U$7  [SFE_LOGO_NAME_FLAME_.1]  25.27,57.18 0 bottom
U$8  [SFE_LOGO_FLAME_.1]  69.85,56.64 0 top
U$9  [SFE_LOGO_NAME_FLAME_.1]  96.9,57.18 0 bottom
U$10  [SFE_LOGO_FLAME_.1]  141.48,56.64 0 top
U$11  [SFE_LOGO_NAME_FLAME_.1]  168.53,57.18 0 bottom
U$12  [SFE_LOGO_FLAME_.1]  213.11,56.64 0 top
U$13  [SFE_LOGO_NAME_FLAME_.1]  25.27,97.31 0 bottom
U$14  [SFE_LOGO_FLAME_.1]  69.85,96.77 0 top
U$15  [SFE_LOGO_NAME_FLAME_.1]  96.9,97.31 0 bottom
U$16  [SFE_LOGO_FLAME_.1]  141.48,96.77 0 top
U$17  [SFE_LOGO_NAME_FLAME_.1]  168.53,97.31 0 bottom
U$18  [SFE_LOGO_FLAME_.1]  213.11,96.77 0 top

## Library data of the parts
C1 C4 C8 C11 C18 C21 C26 C29 C34 C37 C42 C45 C50 C53 C58 C61 C66 C69 = SparkFun-Capacitors; PROD_ID: CAP-00868
C2 C3 C5-C7 C9 C10 C12 C17 C19 C20 C22 C25 C27 C28 C30 C33 C35 C36 C38 C41 C43 C44 C46 C49 C51 C52 C54 C57 C59 C60 C62 C65 C67 C68 C70 = SparkFun-Capacitors; PROD_ID: CAP-00810
C13-C16 C23 C24 C31 C32 C39 C40 C47 C48 C55 C56 C63 C64 C71 C72 = SparkFun-Capacitors; PROD_ID: CAP-00811
D1-D54 = SparkFun-DiscreteSemi; PROD_ID: DIO-09646
E$1 = SparkFun-Retired
E$7 E$8 FID1-FID18 LOGO1-LOGO18 U$1-U$18 = SparkFun-Aesthetics
JP1 JP2 JP4 JP5 JP7 JP8 JP10 JP11 JP13 JP14 JP16 JP17 JP19 JP20 JP22 JP23 JP25 JP26 = SparkFun-Connectors; PROD_ID: CONN-08590
JP1-DNP JP1-DNP1-JP1-DNP8 JP4-DNP JP4-DNP1-JP4-DNP8 = SparkFun-Connectors; PROD_ID: CONN-09696
JP2-DNP JP2-DNP1-JP2-DNP8 JP3-DNP JP3-DNP1-JP3-DNP8 = SparkFun-Connectors
JP3 JP6 JP9 JP12 JP15 JP18 JP21 JP24 JP27 = template_temp
JP5-DNP JP5-DNP1-JP5-DNP8 = SparkFun-Connectors; PROD_ID: CONN-08106; SF_ID: PRT-12748
JP6-DNP JP6-DNP1-JP6-DNP8 = SparkFun-Connectors; PROD_ID: CONN-08399
R1 R2 R4 R5 R17-R21 R28-R31 R38-R41 R48-R51 R58-R61 R68-R71 R78-R81 R88-R90 = SparkFun-Resistors; PROD_ID: RES-07857
R3 R6-R16 R22-R27 R32-R37 R42-R47 R52-R57 R62-R67 R72-R77 R82-R87 = SparkFun-Resistors; PROD_ID: RES-07856
SJ1-SJ27 = SparkFun-Passives
U1 U4 U7 U10 U13 U16 U19 U22 U25 = SparkFun-PowerIC; PROD_ID: VREG-00822
U2 U6 U9 U12 U15 U18 U21 U24 U27 = SparkFun-Sensors; PROD_ID: IC-13093
U3 U5 U8 U11 U14 U17 U20 U23 U26 = SparkFun-Sensors; PROD_ID: IC-10869

## Nets
3.3V: C1.1 C2.1 C5.1 C7.1 C8.1 C14.A D5.C D7.C D9.C JP1-DNP.3 JP2-DNP.3 JP4-DNP.4 R1.1 R17.1 SJ1.2 SJ3.2 U1.5 U2.VDD U3.1 U3.4
3.3V1: C3.1 C4.1 C9.1 C11.1 C12.1 C16.A D1.C D3.C D11.C JP1-DNP1.3 JP2-DNP1.3 JP4-DNP1.4 R2.1 R18.1 SJ4.2 SJ6.2 U4.5 U5.1 U5.4 U6.VDD
3.3V2: C17.1 C18.1 C19.1 C21.1 C22.1 C24.A D13.C D15.C D17.C JP1-DNP2.3 JP2-DNP2.3 JP4-DNP2.4 R21.1 R28.1 SJ7.2 SJ9.2 U7.5 U8.1 U8.4 U9.VDD
3.3V3: C25.1 C26.1 C27.1 C29.1 C30.1 C32.A D19.C D21.C D23.C JP1-DNP3.3 JP2-DNP3.3 JP4-DNP3.4 R31.1 R38.1 SJ10.2 SJ12.2 U10.5 U11.1 U11.4 U12.VDD
3.3V4: C33.1 C34.1 C35.1 C37.1 C38.1 C40.A D25.C D27.C D29.C JP1-DNP4.3 JP2-DNP4.3 JP4-DNP4.4 R41.1 R48.1 SJ13.2 SJ15.2 U13.5 U14.1 U14.4 U15.VDD
3.3V5: C41.1 C42.1 C43.1 C45.1 C46.1 C48.A D31.C D33.C D35.C JP1-DNP5.3 JP2-DNP5.3 JP4-DNP5.4 R51.1 R58.1 SJ16.2 SJ18.2 U16.5 U17.1 U17.4 U18.VDD
3.3V6: C49.1 C50.1 C51.1 C53.1 C54.1 C56.A D37.C D39.C D41.C JP1-DNP6.3 JP2-DNP6.3 JP4-DNP6.4 R61.1 R68.1 SJ19.2 SJ21.2 U19.5 U20.1 U20.4 U21.VDD
3.3V7: C57.1 C58.1 C59.1 C61.1 C62.1 C64.A D43.C D45.C D47.C JP1-DNP7.3 JP2-DNP7.3 JP4-DNP7.4 R71.1 R78.1 SJ22.2 SJ24.2 U22.5 U23.1 U23.4 U24.VDD
3.3V8: C65.1 C66.1 C67.1 C69.1 C70.1 C72.A D49.C D51.C D53.C JP1-DNP8.3 JP2-DNP8.3 JP4-DNP8.4 R81.1 R88.1 SJ25.2 SJ27.2 U25.5 U26.1 U26.4 U27.VDD
GND: C1.2 C2.2 C5.2 C6.2 C7.2 C8.2 C13.C C14.C D6.A D8.A D10.A JP1-DNP.4 JP2-DNP.1 JP3-DNP.1 JP4-DNP.3 JP5-DNP.GND JP5-DNP.P$4 JP6-DNP.1 JP9.2 JP9.21 JP9.GND@0 JP9.GND@2 R12.2 R15.2 R16.2 U1.2 U2.GND U3.3
GND1: C3.2 C4.2 C9.2 C10.2 C11.2 C12.2 C15.C C16.C D2.A D4.A D12.A JP1-DNP1.4 JP2-DNP1.1 JP3-DNP1.1 JP3.2 JP3.21 JP3.GND@0 JP3.GND@2 JP4-DNP1.3 JP5-DNP1.GND JP5-DNP1.P$4 JP6-DNP1.1 R8.2 R9.2 R10.2 U4.2 U5.3 U6.GND
GND2: C17.2 C18.2 C19.2 C20.2 C21.2 C22.2 C23.C C24.C D14.A D16.A D18.A JP1-DNP2.4 JP2-DNP2.1 JP3-DNP2.1 JP4-DNP2.3 JP5-DNP2.GND JP5-DNP2.P$4 JP6-DNP2.1 JP6.2 JP6.21 JP6.GND@0 JP6.GND@2 R25.2 R26.2 R27.2 U7.2 U8.3 U9.GND
GND3: C25.2 C26.2 C27.2 C28.2 C29.2 C30.2 C31.C C32.C D20.A D22.A D24.A JP1-DNP3.4 JP2-DNP3.1 JP3-DNP3.1 JP4-DNP3.3 JP5-DNP3.GND JP5-DNP3.P$4 JP6-DNP3.1 JP12.2 JP12.21 JP12.GND@0 JP12.GND@2 R35.2 R36.2 R37.2 U10.2 U11.3 U12.GND
GND4: C33.2 C34.2 C35.2 C36.2 C37.2 C38.2 C39.C C40.C D26.A D28.A D30.A JP1-DNP4.4 JP2-DNP4.1 JP3-DNP4.1 JP4-DNP4.3 JP5-DNP4.GND JP5-DNP4.P$4 JP6-DNP4.1 JP15.2 JP15.21 JP15.GND@0 JP15.GND@2 R45.2 R46.2 R47.2 U13.2 U14.3 U15.GND
GND5: C41.2 C42.2 C43.2 C44.2 C45.2 C46.2 C47.C C48.C D32.A D34.A D36.A JP1-DNP5.4 JP2-DNP5.1 JP3-DNP5.1 JP4-DNP5.3 JP5-DNP5.GND JP5-DNP5.P$4 JP6-DNP5.1 JP18.2 JP18.21 JP18.GND@0 JP18.GND@2 R55.2 R56.2 R57.2 U16.2 U17.3 U18.GND
GND6: C49.2 C50.2 C51.2 C52.2 C53.2 C54.2 C55.C C56.C D38.A D40.A D42.A JP1-DNP6.4 JP2-DNP6.1 JP3-DNP6.1 JP4-DNP6.3 JP5-DNP6.GND JP5-DNP6.P$4 JP6-DNP6.1 JP21.2 JP21.21 JP21.GND@0 JP21.GND@2 R65.2 R66.2 R67.2 U19.2 U20.3 U21.GND
GND7: C57.2 C58.2 C59.2 C60.2 C61.2 C62.2 C63.C C64.C D44.A D46.A D48.A JP1-DNP7.4 JP2-DNP7.1 JP3-DNP7.1 JP4-DNP7.3 JP5-DNP7.GND JP5-DNP7.P$4 JP6-DNP7.1 JP24.2 JP24.21 JP24.GND@0 JP24.GND@2 R75.2 R76.2 R77.2 U22.2 U23.3 U24.GND
GND8: C65.2 C66.2 C67.2 C68.2 C69.2 C70.2 C71.C C72.C D50.A D52.A D54.A JP1-DNP8.4 JP2-DNP8.1 JP3-DNP8.1 JP4-DNP8.3 JP5-DNP8.GND JP5-DNP8.P$4 JP6-DNP8.1 JP27.2 JP27.21 JP27.GND@0 JP27.GND@2 R85.2 R86.2 R87.2 U25.2 U26.3 U27.GND
N$1: JP8.3 R14.2
N$2: JP8.2 R13.2
N$3: R4.2 SJ1.3
N$4: JP7.3 R11.2
N$5: C6.1 U3.2
N$6: R5.2 SJ1.1
N$7: JP9.3V3 JP9.24 SJ3.1
N$8: C10.1 U5.2
N$9: JP1.2 R7.2
N$10: JP1.3 R3.2
N$11: JP7.4 R12.1
N$12: JP8.5 R15.1
N$13: JP8.4 R16.1
N$14: JP2.3 R6.2
N$15: JP2.4 R8.1
N$16: JP1.5 R9.1
N$17: JP1.4 R10.1
N$18: R19.2 SJ4.3
N$19: R20.2 SJ4.1
N$20: JP3.3V3 JP3.24 SJ6.1
N$21: C20.1 U8.2
N$22: JP4.2 R24.2
N$23: JP4.3 R22.2
N$24: JP5.3 R23.2
N$25: JP5.4 R25.1
N$26: JP4.5 R26.1
N$27: JP4.4 R27.1
N$28: R29.2 SJ7.3
N$29: R30.2 SJ7.1
N$30: JP6.3V3 JP6.24 SJ9.1
N$31: C28.1 U11.2
N$32: JP10.2 R34.2
N$33: JP10.3 R32.2
N$34: JP11.3 R33.2
N$35: JP11.4 R35.1
N$36: JP10.5 R36.1
N$37: JP10.4 R37.1
N$38: R39.2 SJ10.3
N$39: R40.2 SJ10.1
N$40: JP12.3V3 JP12.24 SJ12.1
N$41: C36.1 U14.2
N$42: JP13.2 R44.2
N$43: JP13.3 R42.2
N$44: JP14.3 R43.2
N$45: JP14.4 R45.1
N$46: JP13.5 R46.1
N$47: JP13.4 R47.1
N$48: R49.2 SJ13.3
N$49: R50.2 SJ13.1
N$50: JP15.3V3 JP15.24 SJ15.1
N$51: C44.1 U17.2
N$52: JP16.2 R54.2
N$53: JP16.3 R52.2
N$54: JP17.3 R53.2
N$55: JP17.4 R55.1
N$56: JP16.5 R56.1
N$57: JP16.4 R57.1
N$58: R59.2 SJ16.3
N$59: R60.2 SJ16.1
N$60: JP18.3V3 JP18.24 SJ18.1
N$61: C52.1 U20.2
N$62: JP19.2 R64.2
N$63: JP19.3 R62.2
N$64: JP20.3 R63.2
N$65: JP20.4 R65.1
N$66: JP19.5 R66.1
N$67: JP19.4 R67.1
N$68: R69.2 SJ19.3
N$69: R70.2 SJ19.1
N$70: JP21.3V3 JP21.24 SJ21.1
N$71: C60.1 U23.2
N$72: JP22.2 R74.2
N$73: JP22.3 R72.2
N$74: JP23.3 R73.2
N$75: JP23.4 R75.1
N$76: JP22.5 R76.1
N$77: JP22.4 R77.1
N$78: R79.2 SJ22.3
N$79: R80.2 SJ22.1
N$80: JP24.3V3 JP24.24 SJ24.1
N$81: C68.1 U26.2
N$82: JP25.2 R84.2
N$83: JP25.3 R82.2
N$84: JP26.3 R83.2
N$85: JP26.4 R85.1
N$86: JP25.5 R86.1
N$87: JP25.4 R87.1
N$88: R89.2 SJ25.3
N$89: R90.2 SJ25.1
N$90: JP27.3V3 JP27.24 SJ27.1
PHOTON_VIN: JP9.1 JP9.VIN SJ2.1
PHOTON_VIN1: JP3.1 JP3.VIN SJ5.1
PHOTON_VIN2: JP6.1 JP6.VIN SJ8.1
PHOTON_VIN3: JP12.1 JP12.VIN SJ11.1
PHOTON_VIN4: JP15.1 JP15.VIN SJ14.1
PHOTON_VIN5: JP18.1 JP18.VIN SJ17.1
PHOTON_VIN6: JP21.1 JP21.VIN SJ20.1
PHOTON_VIN7: JP24.1 JP24.VIN SJ23.1
PHOTON_VIN8: JP27.1 JP27.VIN SJ26.1
RAIN: D5.A D6.C JP9.15 JP9.D2 R11.1
RAIN1: D11.A D12.C JP3.15 JP3.D2 R6.1
RAIN2: JP7.2
RAIN3: JP2.2
RAIN4: JP2.5
RAIN5: JP7.5
RAIN6: D17.A D18.C JP6.15 JP6.D2 R23.1
RAIN7: JP5.2
RAIN8: JP5.5
RAIN9: D23.A D24.C JP12.15 JP12.D2 R33.1
RAIN10: JP11.2
RAIN11: JP11.5
RAIN12: D29.A D30.C JP15.15 JP15.D2 R43.1
RAIN13: JP14.2
RAIN14: JP14.5
RAIN15: D35.A D36.C JP18.15 JP18.D2 R53.1
RAIN16: JP17.2
RAIN17: JP17.5
RAIN18: D41.A D42.C JP21.15 JP21.D2 R63.1
RAIN19: JP20.2
RAIN20: JP20.5
RAIN21: D47.A D48.C JP24.15 JP24.D2 R73.1
RAIN22: JP23.2
RAIN23: JP23.5
RAIN24: D53.A D54.C JP27.15 JP27.D2 R83.1
RAIN25: JP26.2
RAIN26: JP26.5
RAW [vcc]: JP5-DNP.VIN0 JP6-DNP.2 SJ2.2
RAW1 [vcc]: JP5-DNP1.VIN0 JP6-DNP1.2 SJ5.2
RAW2 [vcc]: JP5-DNP2.VIN0 JP6-DNP2.2 SJ8.2
RAW3 [vcc]: JP5-DNP3.VIN0 JP6-DNP3.2 SJ11.2
RAW4 [vcc]: JP5-DNP4.VIN0 JP6-DNP4.2 SJ14.2
RAW5 [vcc]: JP5-DNP5.VIN0 JP6-DNP5.2 SJ17.2
RAW6 [vcc]: JP5-DNP6.VIN0 JP6-DNP6.2 SJ20.2
RAW7 [vcc]: JP5-DNP7.VIN0 JP6-DNP7.2 SJ23.2
RAW8 [vcc]: JP5-DNP8.VIN0 JP6-DNP8.2 SJ26.2
RXI: JP4-DNP.2 JP9.4 JP9.RX
RXI1: JP3.4 JP3.RX JP4-DNP1.2
RXI2: JP4-DNP2.2 JP6.4 JP6.RX
RXI3: JP4-DNP3.2 JP12.4 JP12.RX
RXI4: JP4-DNP4.2 JP15.4 JP15.RX
RXI5: JP4-DNP5.2 JP18.4 JP18.RX
RXI6: JP4-DNP6.2 JP21.4 JP21.RX
RXI7: JP4-DNP7.2 JP24.4 JP24.RX
RXI8: JP4-DNP8.2 JP27.4 JP27.RX
SCL: JP1-DNP.1 JP9.14 JP9.D1 R4.1 U2.SCK U3.8
SCL1: JP1-DNP1.1 JP3.14 JP3.D1 R19.1 U5.8 U6.SCK
SCL2: JP1-DNP2.1 JP6.14 JP6.D1 R29.1 U8.8 U9.SCK
SCL3: JP1-DNP3.1 JP12.14 JP12.D1 R39.1 U11.8 U12.SCK
SCL4: JP1-DNP4.1 JP15.14 JP15.D1 R49.1 U14.8 U15.SCK
SCL5: JP1-DNP5.1 JP18.14 JP18.D1 R59.1 U17.8 U18.SCK
SCL6: JP1-DNP6.1 JP21.14 JP21.D1 R69.1 U20.8 U21.SCK
SCL7: JP1-DNP7.1 JP24.14 JP24.D1 R79.1 U23.8 U24.SCK
SCL8: JP1-DNP8.1 JP27.14 JP27.D1 R89.1 U26.8 U27.SCK
SDA: JP1-DNP.2 JP9.13 JP9.D0 R5.1 U2.DATA U3.7
SDA1: JP1-DNP1.2 JP3.13 JP3.D0 R20.1 U5.7 U6.DATA
SDA2: JP1-DNP2.2 JP6.13 JP6.D0 R30.1 U8.7 U9.DATA
SDA3: JP1-DNP3.2 JP12.13 JP12.D0 R40.1 U11.7 U12.DATA
SDA4: JP1-DNP4.2 JP15.13 JP15.D0 R50.1 U14.7 U15.DATA
SDA5: JP1-DNP5.2 JP18.13 JP18.D0 R60.1 U17.7 U18.DATA
SDA6: JP1-DNP6.2 JP21.13 JP21.D0 R70.1 U20.7 U21.DATA
SDA7: JP1-DNP7.2 JP24.13 JP24.D0 R80.1 U23.7 U24.DATA
SDA8: JP1-DNP8.2 JP27.13 JP27.D0 R90.1 U26.7 U27.DATA
SOIL_MOIST: JP3-DNP.2 JP9.11 JP9.A1
SOIL_MOIST3: JP3-DNP1.2 JP3.11 JP3.A1
SOIL_MOIST4: JP3-DNP2.2 JP6.11 JP6.A1
SOIL_MOIST5: JP3-DNP3.2 JP12.11 JP12.A1
SOIL_MOIST6: JP3-DNP4.2 JP15.11 JP15.A1
SOIL_MOIST7: JP3-DNP5.2 JP18.11 JP18.A1
SOIL_MOIST8: JP3-DNP6.2 JP21.11 JP21.A1
SOIL_MOIST9: JP3-DNP7.2 JP24.11 JP24.A1
SOIL_MOIST10: JP3-DNP8.2 JP27.11 JP27.A1
SOIL_MOIST_POWER: JP3-DNP.3 JP9.18 JP9.D5
SOIL_MOIST_POWER1: JP3-DNP1.3 JP3.18 JP3.D5
SOIL_MOIST_POWER2: JP3-DNP2.3 JP6.18 JP6.D5
SOIL_MOIST_POWER3: JP3-DNP3.3 JP12.18 JP12.D5
SOIL_MOIST_POWER4: JP3-DNP4.3 JP15.18 JP15.D5
SOIL_MOIST_POWER5: JP3-DNP5.3 JP18.18 JP18.D5
SOIL_MOIST_POWER6: JP3-DNP6.3 JP21.18 JP21.D5
SOIL_MOIST_POWER7: JP3-DNP7.3 JP24.18 JP24.D5
SOIL_MOIST_POWER8: JP3-DNP8.3 JP27.18 JP27.D5
SOIL_TEMP: JP2-DNP.2 JP9.17 JP9.D4 R1.2
SOIL_TEMP2: JP2-DNP1.2 JP3.17 JP3.D4 R18.2
SOIL_TEMP3: JP2-DNP2.2 JP6.17 JP6.D4 R28.2
SOIL_TEMP4: JP2-DNP3.2 JP12.17 JP12.D4 R38.2
SOIL_TEMP5: JP2-DNP4.2 JP15.17 JP15.D4 R48.2
SOIL_TEMP6: JP2-DNP5.2 JP18.17 JP18.D4 R58.2
SOIL_TEMP7: JP2-DNP6.2 JP21.17 JP21.D4 R68.2
SOIL_TEMP8: JP2-DNP7.2 JP24.17 JP24.D4 R78.2
SOIL_TEMP9: JP2-DNP8.2 JP27.17 JP27.D4 R88.2
TXO: JP4-DNP.1 JP9.3 JP9.TX
TXO1: JP3.3 JP3.TX JP4-DNP1.1
TXO2: JP4-DNP2.1 JP6.3 JP6.TX
TXO3: JP4-DNP3.1 JP12.3 JP12.TX
TXO4: JP4-DNP4.1 JP15.3 JP15.TX
TXO5: JP4-DNP5.1 JP18.3 JP18.TX
TXO6: JP4-DNP6.1 JP21.3 JP21.TX
TXO7: JP4-DNP7.1 JP24.3 JP24.TX
TXO8: JP4-DNP8.1 JP27.3 JP27.TX
VREG: C13.A SJ2.3 U1.1 U1.3
VREG1: C15.A SJ5.3 U4.1 U4.3
VREG2: C23.A SJ8.3 U7.1 U7.3
VREG3: C31.A SJ11.3 U10.1 U10.3
VREG4: C39.A SJ14.3 U13.1 U13.3
VREG5: C47.A SJ17.3 U16.1 U16.3
VREG6: C55.A SJ20.3 U19.1 U19.3
VREG7: C63.A SJ23.3 U22.1 U22.3
VREG8: C71.A SJ26.3 U25.1 U25.3
WDIR: D7.A D8.C JP9.12 JP9.A0 R13.1 R17.2
WDIR1: D3.A D4.C JP3.12 JP3.A0 R2.2 R7.1
WDIR2: D15.A D16.C JP6.12 JP6.A0 R21.2 R24.1
WDIR3: D21.A D22.C JP12.12 JP12.A0 R31.2 R34.1
WDIR4: D27.A D28.C JP15.12 JP15.A0 R41.2 R44.1
WDIR5: D33.A D34.C JP18.12 JP18.A0 R51.2 R54.1
WDIR6: D39.A D40.C JP21.12 JP21.A0 R61.2 R64.1
WDIR7: D45.A D46.C JP24.12 JP24.A0 R71.2 R74.1
WDIR8: D51.A D52.C JP27.12 JP27.A0 R81.2 R84.1
WSPEED: D9.A D10.C JP9.16 JP9.D3 R14.1
WSPEED1: D1.A D2.C JP3.16 JP3.D3 R3.1
WSPEED2: D13.A D14.C JP6.16 JP6.D3 R22.1
WSPEED3: D19.A D20.C JP12.16 JP12.D3 R32.1
WSPEED4: D25.A D26.C JP15.16 JP15.D3 R42.1
WSPEED5: D31.A D32.C JP18.16 JP18.D3 R52.1
WSPEED6: D37.A D38.C JP21.16 JP21.D3 R62.1
WSPEED7: D43.A D44.C JP24.16 JP24.D3 R72.1
WSPEED8: D49.A D50.C JP27.16 JP27.D3 R82.1

## Tracks (layer width: path | path; a pad name or v marks a point on that pad's centre or on a via)
3.3V  (via drill 0.51)
  Top 0.203: U2.VDD 15.11,17.12 15.54,16.69 15.96,16.69 | 15.96,16.69 18.92,16.69 19.13,16.48 19.13,15.76 C8.1 | 15.96,16.04 15.96,16.69 | U3.1 20.22,19.18 20.34,19.3 23.85,19.3 23.97,19.18 U3.4 | U3.4 | JP4-DNP.4 8.13,25.91 9.17,26.95 21.36,26.95 21.59,27.18 22.1,27.18 | 22.1,27.18 D5.C | v24.64,25.53 22.76,25.53 22.1,26.19 22.1,27.18 | v25.27,17.65 25.04,17.42 24.18,17.42 23.97,17.63 U3.4
  Top 0.254: C7.1 15.96,16.04 | C8.1 C5.1 20.61,16.34 20.22,16.73 U3.1 20.19,18.39 | JP2-DNP.3 70.78,8.55 R1.1 74.59,8.55 v74.8,8.76 | 45.41,22.06 C2.1 43.69,22.1 | v63.37,25.02 D7.C D9.C 66.76,24.73 R17.1 66.76,26.96 v65.91,27.81 | v73.53,20.19 SJ1.2 73.53,25.27 72.9,25.91 v72.26,25.91 | 43.37,23.37 39.46,23.37 | 39.46,23.37 C1.1 | 39.46,23.37 38.86,23.37 38.61,23.62 C14.A 37.47,24.51 36.07,25.91 v36.07,27.18 | U1.5 43.37,23.37 | 43.37,23.37 43.37,22.42 43.69,22.1 | v43.69,20.83 43.69,22.1 | 24,18.33 U3.4
  Bottom 0.203: SJ3.2 42.93,24.13 42.42,24.64 42.42,25.91 43.69,27.18 61.21,27.18 v63.37,25.02 | v36.07,27.18 25.91,27.18 24.64,25.91 v24.64,25.53
  Bottom 0.254: v74.8,8.76 74.8,17.02 | 74.8,17.02 74.8,18.92 v73.53,20.19 | JP1-DNP.3 74.8,17.02 | v72.26,25.91 68.45,25.91 66.55,27.81 v65.91,27.81 | SJ3.2 42.93,21.59 v43.69,20.83 | v25.27,17.65 25.27,22.1 26.54,23.37 26.54,24.38 25.4,25.53 v24.64,25.53
3.3V1  (via drill 0.51)
  Top 0.203: U6.VDD 86.74,17.12 87.17,16.69 87.59,16.69 | 87.59,16.69 90.55,16.69 90.75,16.48 90.75,15.76 C11.1 | 87.59,16.04 87.59,16.69 | U5.1 91.85,19.18 91.97,19.3 95.48,19.3 95.6,19.18 U5.4 | U5.4 | JP4-DNP1.4 79.76,25.91 80.8,26.95 92.99,26.95 93.22,27.18 93.73,27.18 | 93.73,27.18 D11.C | v96.27,25.53 94.39,25.53 93.73,26.19 93.73,27.18 | v96.9,17.65 96.67,17.42 95.81,17.42 95.6,17.63 U5.4
  Top 0.254: C9.1 87.59,16.04 | C11.1 C12.1 92.24,16.34 91.85,16.73 U5.1 91.82,18.39 | JP2-DNP1.3 142.41,8.55 R18.1 146.22,8.55 v146.43,8.76 | 117.04,22.06 C3.1 115.32,22.1 | v135,25.02 D3.C D1.C 138.39,24.73 R2.1 138.39,26.96 v137.54,27.81 | v145.16,20.19 SJ4.2 145.16,25.27 144.53,25.91 v143.89,25.91 | 115,23.37 111.09,23.37 | 111.09,23.37 C4.1 | 111.09,23.37 110.49,23.37 110.24,23.62 C16.A 109.1,24.51 107.7,25.91 v107.7,27.18 | U4.5 115,23.37 | 115,23.37 115,22.42 115.32,22.1 | v115.32,20.83 115.32,22.1 | 95.63,18.33 U5.4
  Bottom 0.203: SJ6.2 114.55,24.13 114.05,24.64 114.05,25.91 115.32,27.18 132.84,27.18 v135,25.02 | v107.7,27.18 97.54,27.18 96.27,25.91 v96.27,25.53
  Bottom 0.254: v146.43,8.76 146.43,17.02 | 146.43,17.02 146.43,18.92 v145.16,20.19 | JP1-DNP1.3 146.43,17.02 | v143.89,25.91 140.08,25.91 138.18,27.81 v137.54,27.81 | SJ6.2 114.55,21.59 v115.32,20.83 | v96.9,17.65 96.9,22.1 98.17,23.37 98.17,24.38 97.03,25.53 v96.27,25.53
3.3V2  (via drill 0.51)
  Top 0.203: U9.VDD 158.37,17.12 158.8,16.69 159.22,16.69 | 159.22,16.69 162.18,16.69 162.38,16.48 C21.1 | 159.22,16.04 159.22,16.69 | U8.1 163.48,19.18 163.6,19.3 167.11,19.3 167.23,19.18 U8.4 | U8.4 | JP4-DNP2.4 151.38,25.91 152.43,26.95 164.62,26.95 164.85,27.18 165.35,27.18 | 165.35,27.18 D17.C | v167.89,25.53 166.01,25.53 165.35,26.19 165.35,27.18 | v168.53,17.65 168.3,17.42 167.44,17.42 167.23,17.63 U8.4
  Top 0.254: C19.1 159.22,16.04 | C21.1 C22.1 163.87,16.34 163.48,16.73 U8.1 163.45,18.39 | JP2-DNP2.3 214.03,8.55 R28.1 217.84,8.55 v218.06,8.76 | 188.67,22.06 C17.1 186.94,22.1 | v206.63,25.02 D15.C D13.C 210.02,24.73 R21.1 210.02,26.96 v209.17,27.81 | v216.79,20.19 SJ7.2 216.79,25.27 216.15,25.91 v215.52,25.91 | 186.62,23.37 182.71,23.37 | 182.71,23.37 C18.1 | 182.71,23.37 182.12,23.37 181.86,23.62 C24.A 180.72,24.51 179.32,25.91 v179.32,27.18 | U7.5 186.62,23.37 | 186.62,23.37 186.62,22.42 186.94,22.1 | v186.94,20.83 186.94,22.1 | 167.26,18.33 U8.4
  Bottom 0.203: SJ9.2 186.18,24.13 185.67,24.64 185.67,25.91 186.94,27.18 204.47,27.18 v206.63,25.02 | v179.32,27.18 169.16,27.18 167.89,25.91 v167.89,25.53
  Bottom 0.254: v218.06,8.76 218.06,17.02 | 218.06,17.02 218.06,18.92 v216.79,20.19 | JP1-DNP2.3 218.06,17.02 | v215.52,25.91 211.71,25.91 209.8,27.81 v209.17,27.81 | SJ9.2 186.18,21.59 v186.94,20.83 | v168.53,17.65 168.53,22.1 169.8,23.37 169.8,24.38 168.66,25.53 v167.89,25.53
3.3V3  (via drill 0.51)
  Top 0.203: U12.VDD 15.11,57.25 15.54,56.82 15.96,56.82 | 15.96,56.82 18.92,56.82 19.13,56.62 19.13,55.89 C29.1 | 15.96,56.17 15.96,56.82 | U11.1 20.22,59.31 20.34,59.44 23.85,59.44 23.97,59.31 U11.4 | U11.4 | JP4-DNP3.4 8.13,66.04 9.17,67.08 21.36,67.08 21.59,67.31 22.1,67.31 | 22.1,67.31 D23.C | v24.64,65.66 22.76,65.66 22.1,66.32 22.1,67.31 | v25.27,57.78 25.04,57.56 24.18,57.56 23.97,57.76 U11.4
  Top 0.254: C27.1 15.96,56.17 | C29.1 C30.1 20.61,56.48 20.22,56.87 U11.1 20.19,58.52 | JP2-DNP3.3 70.78,48.68 R38.1 74.59,48.68 v74.8,48.9 | 45.41,62.19 C25.1 43.69,62.23 | v63.37,65.15 D21.C D19.C 66.76,64.86 R31.1 66.76,67.09 v65.91,67.94 | v73.53,60.33 SJ10.2 73.53,65.41 72.9,66.04 v72.26,66.04 | 43.37,63.5 39.46,63.5 | 39.46,63.5 C26.1 | 39.46,63.5 38.86,63.5 38.61,63.75 C32.A 37.47,64.64 36.07,66.04 v36.07,67.31 | U10.5 43.37,63.5 | 43.37,63.5 43.37,62.55 43.69,62.23 | v43.69,60.96 43.69,62.23 | 24,58.46 U11.4
  Bottom 0.203: SJ12.2 42.93,64.26 42.42,64.77 42.42,66.04 43.69,67.31 61.21,67.31 v63.37,65.15 | v36.07,67.31 25.91,67.31 24.64,66.04 v24.64,65.66
  Bottom 0.254: v74.8,48.9 74.8,57.15 | 74.8,57.15 74.8,59.05 v73.53,60.33 | JP1-DNP3.3 74.8,57.15 | v72.26,66.04 68.45,66.04 66.55,67.94 v65.91,67.94 | SJ12.2 42.93,61.72 v43.69,60.96 | v25.27,57.78 25.27,62.23 26.54,63.5 26.54,64.52 25.4,65.66 v24.64,65.66
3.3V4  (via drill 0.51)
  Top 0.203: U15.VDD 86.74,57.25 87.17,56.82 87.59,56.82 | 87.59,56.82 90.55,56.82 90.75,56.62 90.75,55.89 C37.1 | 87.59,56.17 87.59,56.82 | U14.1 91.85,59.31 91.97,59.44 95.48,59.44 95.6,59.31 U14.4 | U14.4 | JP4-DNP4.4 79.76,66.04 80.8,67.08 92.99,67.08 93.22,67.31 93.73,67.31 | 93.73,67.31 D29.C | v96.27,65.66 94.39,65.66 93.73,66.32 93.73,67.31 | v96.9,57.78 96.67,57.56 95.81,57.56 95.6,57.76 U14.4
  Top 0.254: C35.1 87.59,56.17 | C37.1 C38.1 92.24,56.48 91.85,56.87 U14.1 91.82,58.52 | JP2-DNP4.3 142.41,48.68 R48.1 146.22,48.68 v146.43,48.9 | 117.04,62.19 C33.1 115.32,62.23 | v135,65.15 D27.C D25.C 138.39,64.86 R41.1 138.39,67.09 v137.54,67.94 | v145.16,60.33 SJ13.2 145.16,65.41 144.53,66.04 v143.89,66.04 | 115,63.5 111.09,63.5 | 111.09,63.5 C34.1 | 111.09,63.5 110.49,63.5 110.24,63.75 C40.A 109.1,64.64 107.7,66.04 v107.7,67.31 | U13.5 115,63.5 | 115,63.5 115,62.55 115.32,62.23 | v115.32,60.96 115.32,62.23 | 95.63,58.46 U14.4
  Bottom 0.203: SJ15.2 114.55,64.26 114.05,64.77 114.05,66.04 115.32,67.31 132.84,67.31 v135,65.15 | v107.7,67.31 97.54,67.31 96.27,66.04 v96.27,65.66
  Bottom 0.254: v146.43,48.9 146.43,57.15 | 146.43,57.15 146.43,59.05 v145.16,60.33 | JP1-DNP4.3 146.43,57.15 | v143.89,66.04 140.08,66.04 138.18,67.94 v137.54,67.94 | SJ15.2 114.55,61.72 v115.32,60.96 | v96.9,57.78 96.9,62.23 98.17,63.5 98.17,64.52 97.03,65.66 v96.27,65.66
3.3V5  (via drill 0.51)
  Top 0.203: U18.VDD 158.37,57.25 158.8,56.82 159.22,56.82 | 159.22,56.82 162.18,56.82 162.38,56.62 162.38,55.89 C45.1 | 159.22,56.17 159.22,56.82 | U17.1 163.48,59.31 163.6,59.44 167.11,59.44 167.23,59.31 U17.4 | U17.4 | JP4-DNP5.4 151.38,66.04 152.43,67.08 164.62,67.08 164.85,67.31 165.35,67.31 | 165.35,67.31 D35.C | v167.89,65.66 166.01,65.66 165.35,66.32 165.35,67.31 | v168.53,57.78 168.3,57.56 167.44,57.56 167.23,57.76 U17.4
  Top 0.254: C43.1 159.22,56.17 | C45.1 C46.1 163.87,56.48 163.48,56.87 U17.1 163.45,58.52 | JP2-DNP5.3 214.03,48.68 R58.1 217.84,48.68 v218.06,48.9 | 188.67,62.19 C41.1 186.94,62.23 | v206.63,65.15 D33.C D31.C 210.02,64.86 R51.1 210.02,67.09 v209.17,67.94 | v216.79,60.33 SJ16.2 216.79,65.41 216.15,66.04 v215.52,66.04 | 186.62,63.5 182.71,63.5 | 182.71,63.5 C42.1 | 182.71,63.5 182.12,63.5 181.86,63.75 C48.A 180.72,64.64 179.32,66.04 v179.32,67.31 | U16.5 186.62,63.5 | 186.62,63.5 186.62,62.55 186.94,62.23 | v186.94,60.96 186.94,62.23 | 167.26,58.46 U17.4
  Bottom 0.203: SJ18.2 186.18,64.26 185.67,64.77 185.67,66.04 186.94,67.31 204.47,67.31 v206.63,65.15 | v179.32,67.31 169.16,67.31 167.89,66.04 v167.89,65.66
  Bottom 0.254: v218.06,48.9 218.06,57.15 | 218.06,57.15 218.06,59.05 v216.79,60.33 | JP1-DNP5.3 218.06,57.15 | v215.52,66.04 211.71,66.04 209.8,67.94 v209.17,67.94 | SJ18.2 186.18,61.72 v186.94,60.96 | v168.53,57.78 168.53,62.23 169.8,63.5 169.8,64.52 168.66,65.66 v167.89,65.66
3.3V6  (via drill 0.51)
  Top 0.203: U21.VDD 15.11,97.38 15.54,96.95 15.96,96.95 | 15.96,96.95 18.92,96.95 19.13,96.75 19.13,96.02 C53.1 | 15.96,96.31 15.96,96.95 | U20.1 20.22,99.45 20.34,99.57 23.85,99.57 23.97,99.45 U20.4 | U20.4 | JP4-DNP6.4 8.13,106.17 9.17,107.21 21.36,107.21 21.59,107.44 22.1,107.44 | 22.1,107.44 D41.C | v24.64,105.79 22.76,105.79 22.1,106.45 22.1,107.44 | v25.27,97.92 25.04,97.69 24.18,97.69 23.97,97.9 U20.4
  Top 0.254: C51.1 15.96,96.31 | C53.1 C54.1 20.61,96.61 20.22,97 U20.1 20.19,98.65 | JP2-DNP6.3 70.78,88.81 R68.1 74.59,88.81 v74.8,89.03 | 45.41,102.33 C49.1 43.69,102.36 | v63.37,105.28 D39.C D37.C 66.76,105 R61.1 66.76,107.23 v65.91,108.08 | v73.53,100.46 SJ19.2 73.53,105.54 72.9,106.17 v72.26,106.17 | 43.37,103.63 39.46,103.63 | 39.46,103.63 C50.1 | 39.46,103.63 38.86,103.63 38.61,103.89 C56.A 37.47,104.77 36.07,106.17 v36.07,107.44 | U19.5 43.37,103.63 | 43.37,103.63 43.37,102.68 43.69,102.36 | v43.69,101.09 43.69,102.36 | 24,98.59 U20.4
  Bottom 0.203: SJ21.2 42.93,104.39 42.42,104.9 42.42,106.17 43.69,107.44 61.21,107.44 v63.37,105.28 | v36.07,107.44 25.91,107.44 24.64,106.17 v24.64,105.79
  Bottom 0.254: v74.8,89.03 74.8,97.28 | 74.8,97.28 74.8,99.19 v73.53,100.46 | JP1-DNP6.3 74.8,97.28 | v72.26,106.17 68.45,106.17 66.55,108.08 v65.91,108.08 | SJ21.2 42.93,101.85 v43.69,101.09 | v25.27,97.92 25.27,102.36 26.54,103.63 26.54,104.65 25.4,105.79 v24.64,105.79
3.3V7  (via drill 0.51)
  Top 0.203: U24.VDD 86.74,97.38 87.17,96.95 87.59,96.95 | 87.59,96.95 90.55,96.95 90.75,96.75 90.75,96.02 C61.1 | 87.59,96.31 87.59,96.95 | U23.1 91.85,99.45 91.97,99.57 95.48,99.57 95.6,99.45 U23.4 | U23.4 | JP4-DNP7.4 79.76,106.17 80.8,107.21 92.99,107.21 93.22,107.44 93.73,107.44 | 93.73,107.44 D47.C | v96.27,105.79 94.39,105.79 93.73,106.45 93.73,107.44 | v96.9,97.92 96.67,97.69 95.81,97.69 95.6,97.9 U23.4
  Top 0.254: C59.1 87.59,96.31 | C61.1 C62.1 92.24,96.61 91.85,97 U23.1 91.82,98.65 | JP2-DNP7.3 142.41,88.81 R78.1 146.22,88.81 v146.43,89.03 | 117.04,102.33 C57.1 115.32,102.36 | v135,105.28 D45.C D43.C 138.39,105 R71.1 138.39,107.23 v137.54,108.08 | v145.16,100.46 SJ22.2 145.16,105.54 144.53,106.17 v143.89,106.17 | 115,103.63 111.09,103.63 | 111.09,103.63 C58.1 | 111.09,103.63 110.49,103.63 110.24,103.89 C64.A 109.1,104.77 107.7,106.17 v107.7,107.44 | U22.5 115,103.63 | 115,103.63 115,102.68 115.32,102.36 | v115.32,101.09 115.32,102.36 | 95.63,98.59 U23.4
  Bottom 0.203: SJ24.2 114.55,104.39 114.05,104.9 114.05,106.17 115.32,107.44 132.84,107.44 v135,105.28 | v107.7,107.44 97.54,107.44 96.27,106.17 v96.27,105.79
  Bottom 0.254: v146.43,89.03 146.43,97.28 | 146.43,97.28 146.43,99.19 v145.16,100.46 | JP1-DNP7.3 146.43,97.28 | v143.89,106.17 140.08,106.17 138.18,108.08 v137.54,108.08 | SJ24.2 114.55,101.85 v115.32,101.09 | v96.9,97.92 96.9,102.36 98.17,103.63 98.17,104.65 97.03,105.79 v96.27,105.79
3.3V8  (via drill 0.51)
  Top 0.203: U27.VDD 158.37,97.38 158.8,96.95 159.22,96.95 | 159.22,96.95 162.18,96.95 162.38,96.75 162.38,96.02 C69.1 | 159.22,96.31 159.22,96.95 | U26.1 163.48,99.45 163.6,99.57 167.11,99.57 167.23,99.45 U26.4 | U26.4 | JP4-DNP8.4 151.38,106.17 152.43,107.21 164.62,107.21 164.85,107.44 165.35,107.44 | 165.35,107.44 D53.C | v167.89,105.79 166.01,105.79 165.35,106.45 165.35,107.44 | v168.53,97.92 168.3,97.69 167.44,97.69 167.23,97.9 U26.4
  Top 0.254: C67.1 159.22,96.31 | C69.1 C70.1 163.87,96.61 163.48,97 U26.1 163.45,98.65 | JP2-DNP8.3 214.03,88.81 R88.1 217.84,88.81 v218.06,89.03 | 188.67,102.33 C65.1 186.94,102.36 | v206.63,105.28 D51.C D49.C 210.02,105 R81.1 210.02,107.23 v209.17,108.08 | v216.79,100.46 SJ25.2 216.79,105.54 216.15,106.17 v215.52,106.17 | 186.62,103.63 182.71,103.63 | 182.71,103.63 C66.1 | 182.71,103.63 182.12,103.63 181.86,103.89 C72.A 180.72,104.77 179.32,106.17 v179.32,107.44 | U25.5 186.62,103.63 | 186.62,103.63 186.62,102.68 186.94,102.36 | v186.94,101.09 186.94,102.36 | 167.26,98.59 U26.4
  Bottom 0.203: SJ27.2 186.18,104.39 185.67,104.9 185.67,106.17 186.94,107.44 204.47,107.44 v206.63,105.28 | v179.32,107.44 169.16,107.44 167.89,106.17 v167.89,105.79
  Bottom 0.254: v218.06,89.03 218.06,97.28 | 218.06,97.28 218.06,99.19 v216.79,100.46 | JP1-DNP8.3 218.06,97.28 | v215.52,106.17 211.71,106.17 209.8,108.08 v209.17,108.08 | SJ27.2 186.18,101.85 v186.94,101.09 | v168.53,97.92 168.53,102.36 169.8,103.63 169.8,104.65 168.66,105.79 v167.89,105.79
GND  (via drill 0.51)
  Top 0.203: U3.3 22.72,17.54 22.86,17.4 23.5,17.4 24.26,16.64 25.27,16.64 25.49,16.42 C6.2
  Top 0.254: C6.2 25.53,15.71 25.53,14.99 25.27,14.73 22.31,14.73 | 17.44,14.73 14.48,14.73 14.26,14.95 C7.2 14.26,16.6 13.59,17.27 13.08,17.27 | 17.44,14.73 22.31,14.73 | C5.2 22.31,14.73 | C8.2 17.44,14.73 | 13.08,17.27 10.54,17.27 10.03,16.76 10.03,12.57 | v19.56,25.91 13.36,25.91 12.65,25.2 11.23,25.2 10.67,24.64 | JP3-DNP.1 11.94,8.13 | U2.GND 15.11,21.72 14.99,21.84 13.46,21.84 13.08,21.46 13.08,17.27
  other vias: 58.93,22.1 76.71,9.4 69.65,20.22 67.74,11.43 69.09,13.84 22.1,28.45 27.05,29.72 38.61,10.67 41.66,15.11
  pour Bottom (isolate 0.305): 6.86,6.86 6.86,42.42 77.98,42.42 77.98,6.86
  pour Top (isolate 0.305): 6.86,6.86 6.86,42.42 77.98,42.42 77.98,6.86
GND1  (via drill 0.51)
  Top 0.203: U5.3 94.35,17.54 94.49,17.4 95.12,17.4 95.89,16.64 96.9,16.64 97.12,16.42 C10.2